# Altium PCB pcb.PcbDoc
Units mm, origin at the board's own origin, x right, y up, seen from the top; angles counter-clockwise.
Board outline 50 x 50 mm, 2 copper layers (Top Layer, Bottom Layer); 80 components, 69 nets, 283 pads, 191 vias.
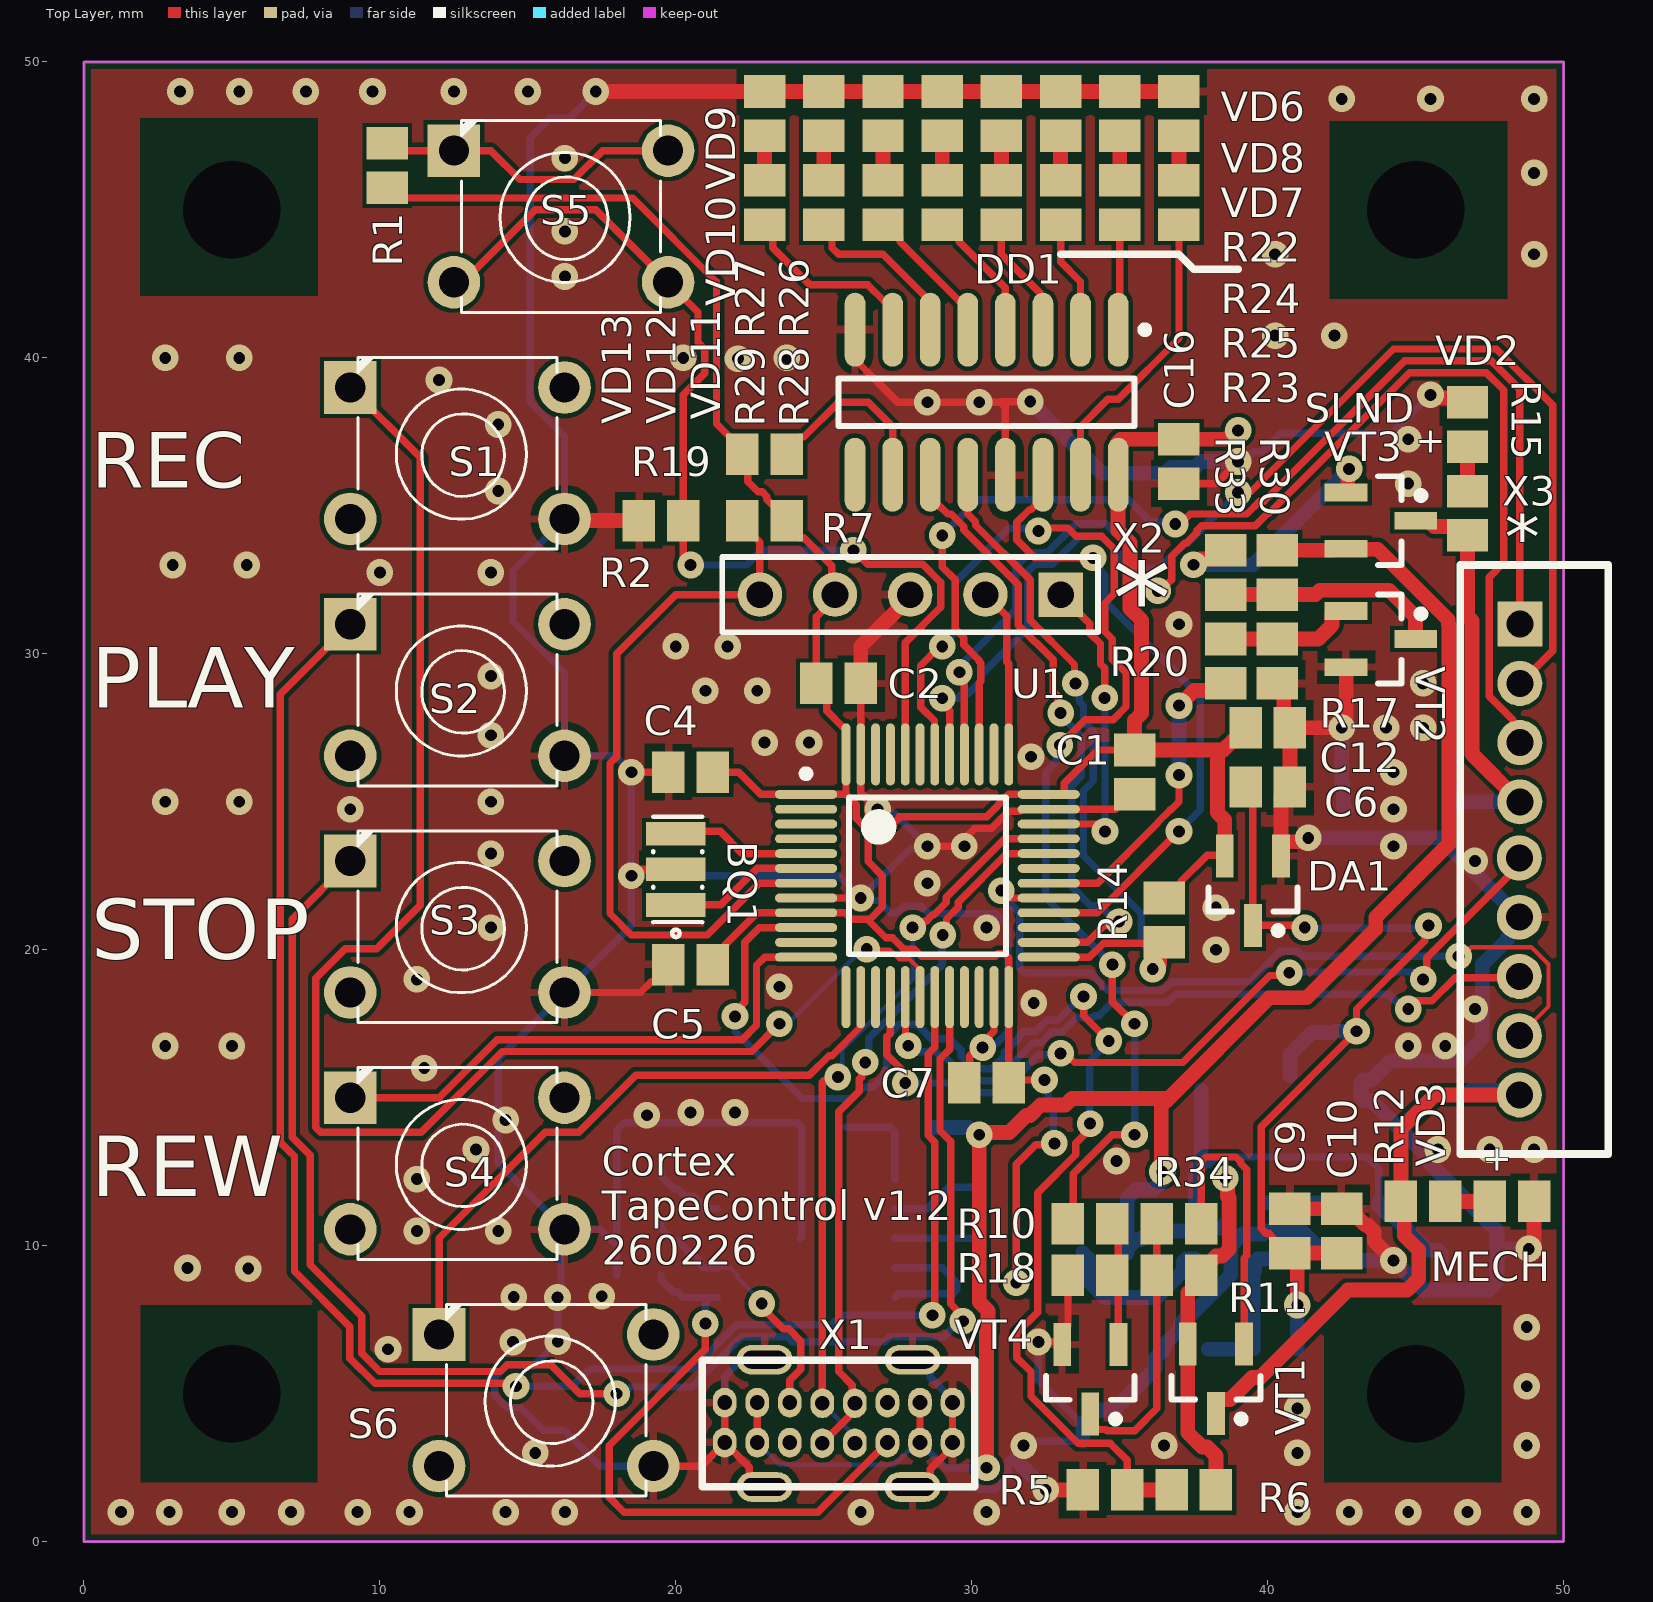
[diagram p0: Top Layer view]
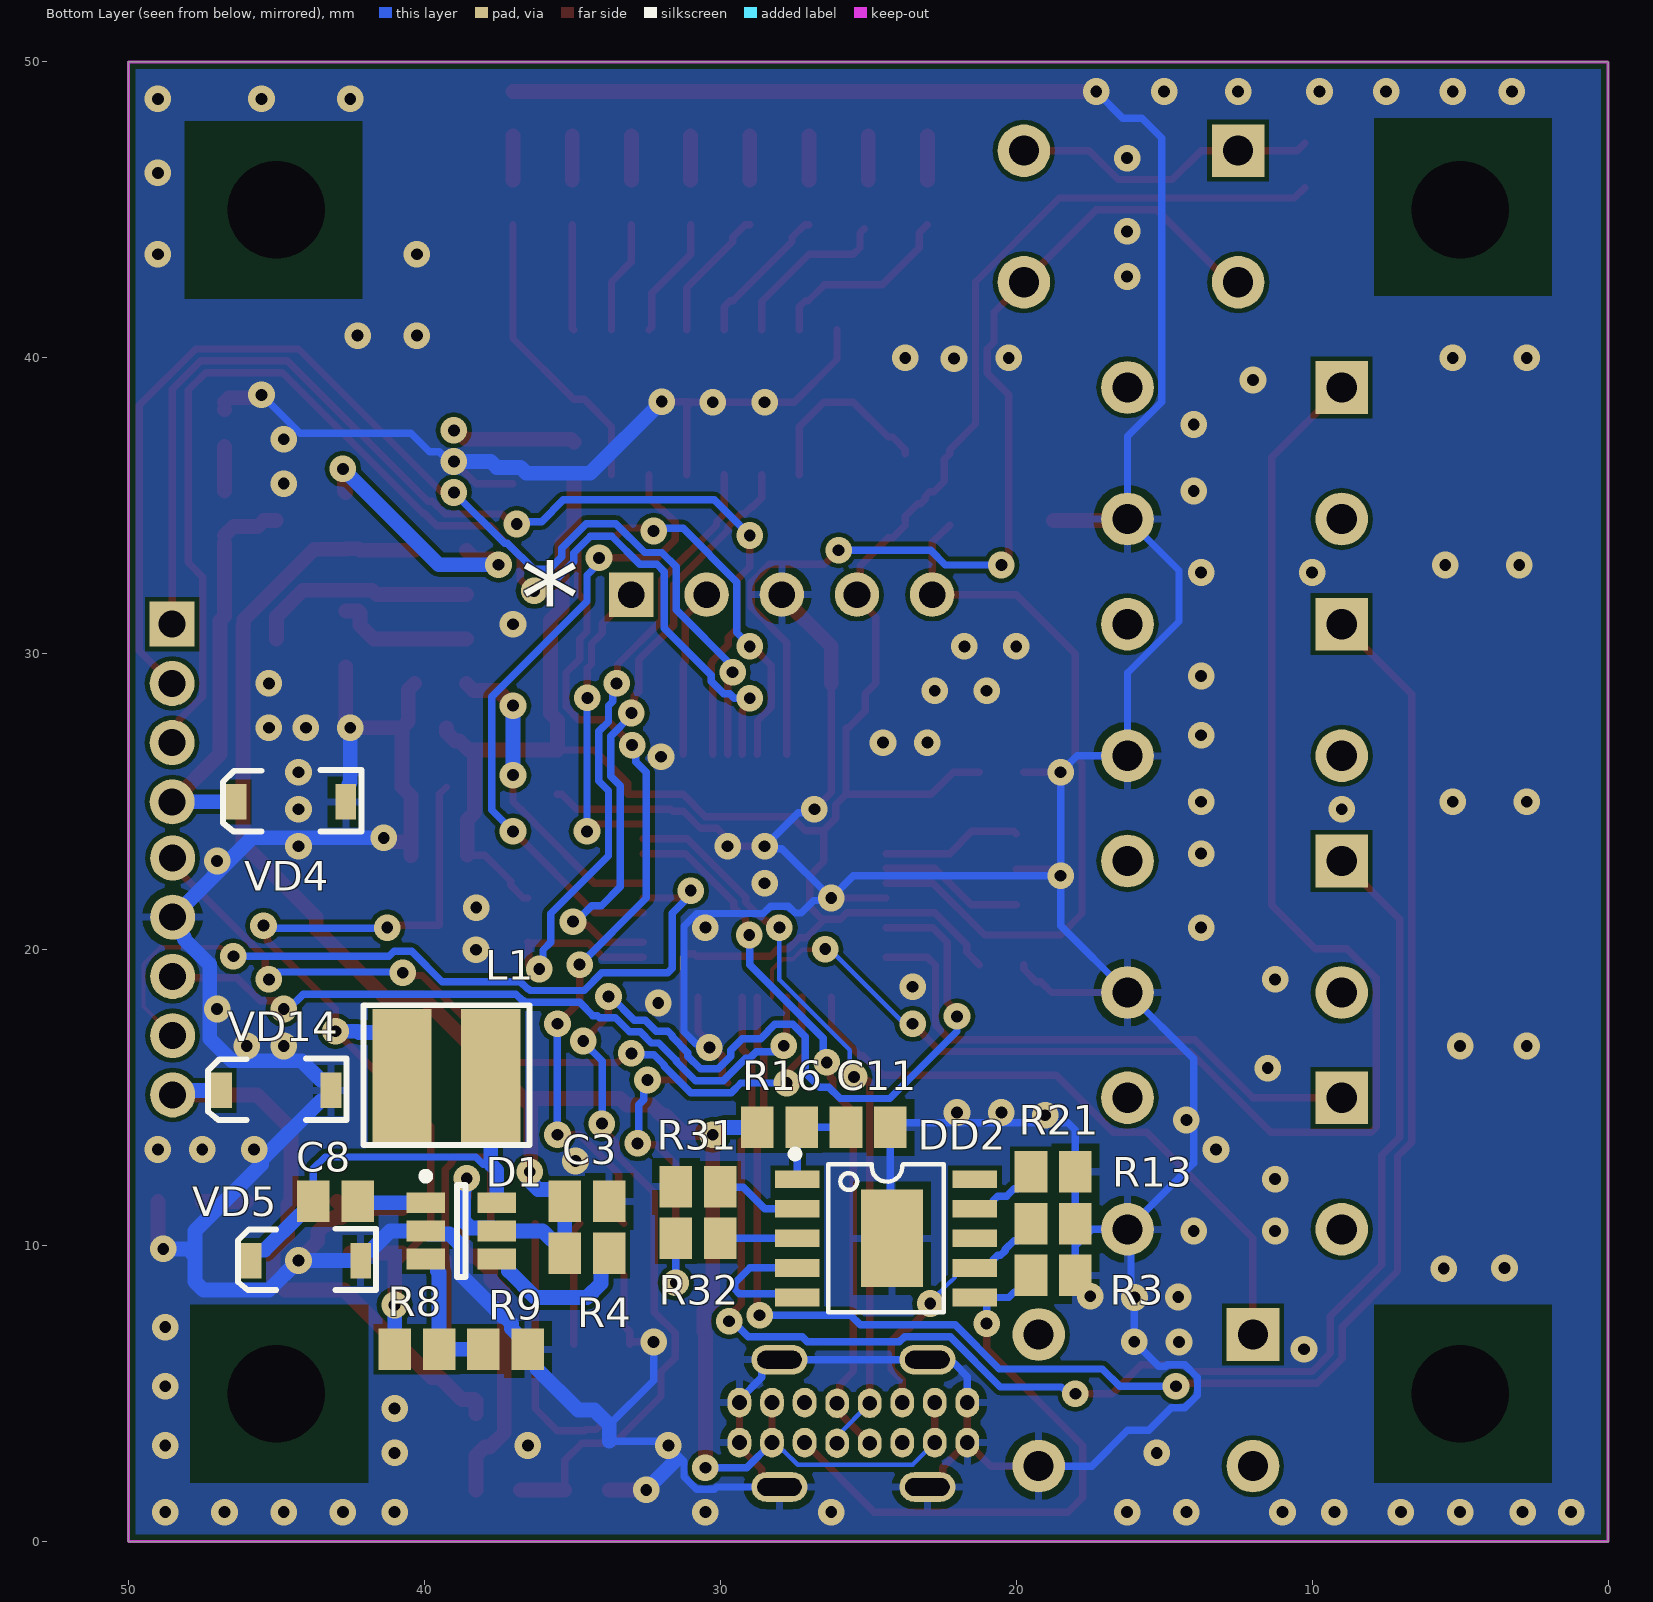
[diagram p1: Bottom Layer view, seen from below]
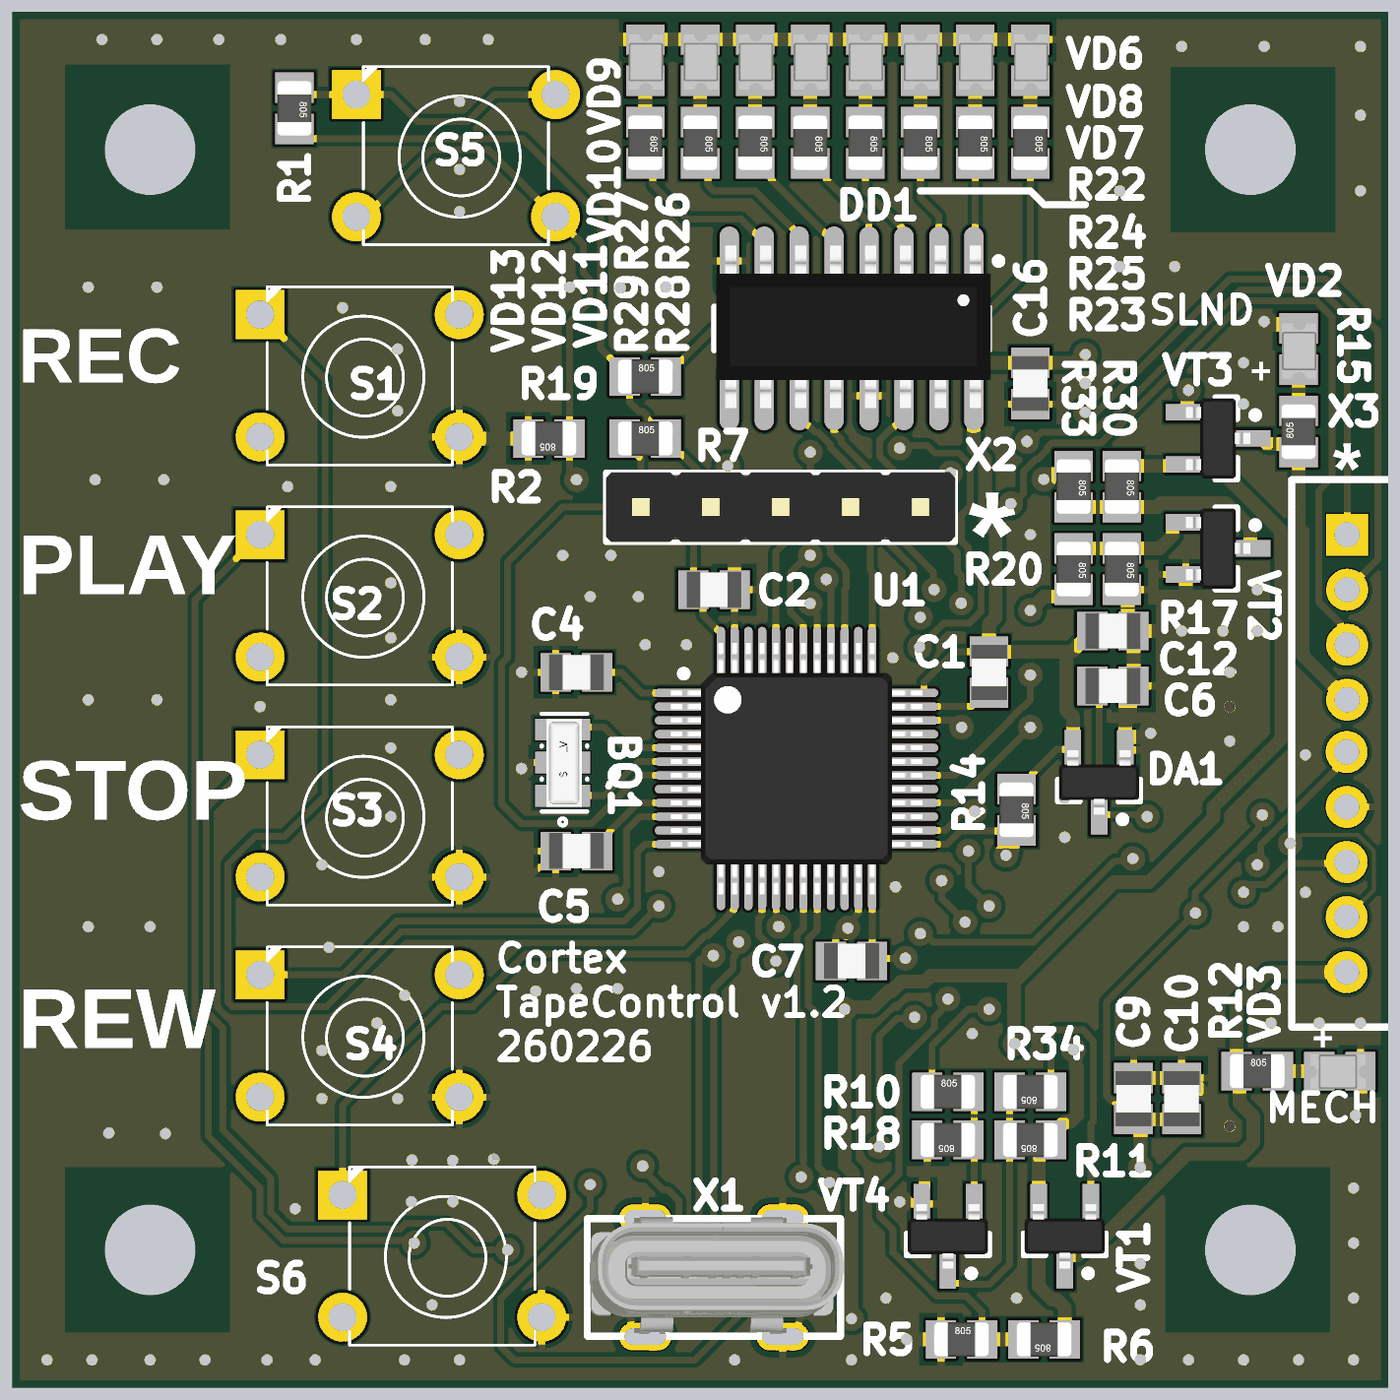
[diagram p2: 3D render of the assembled board from above, using the file's embedded part models]
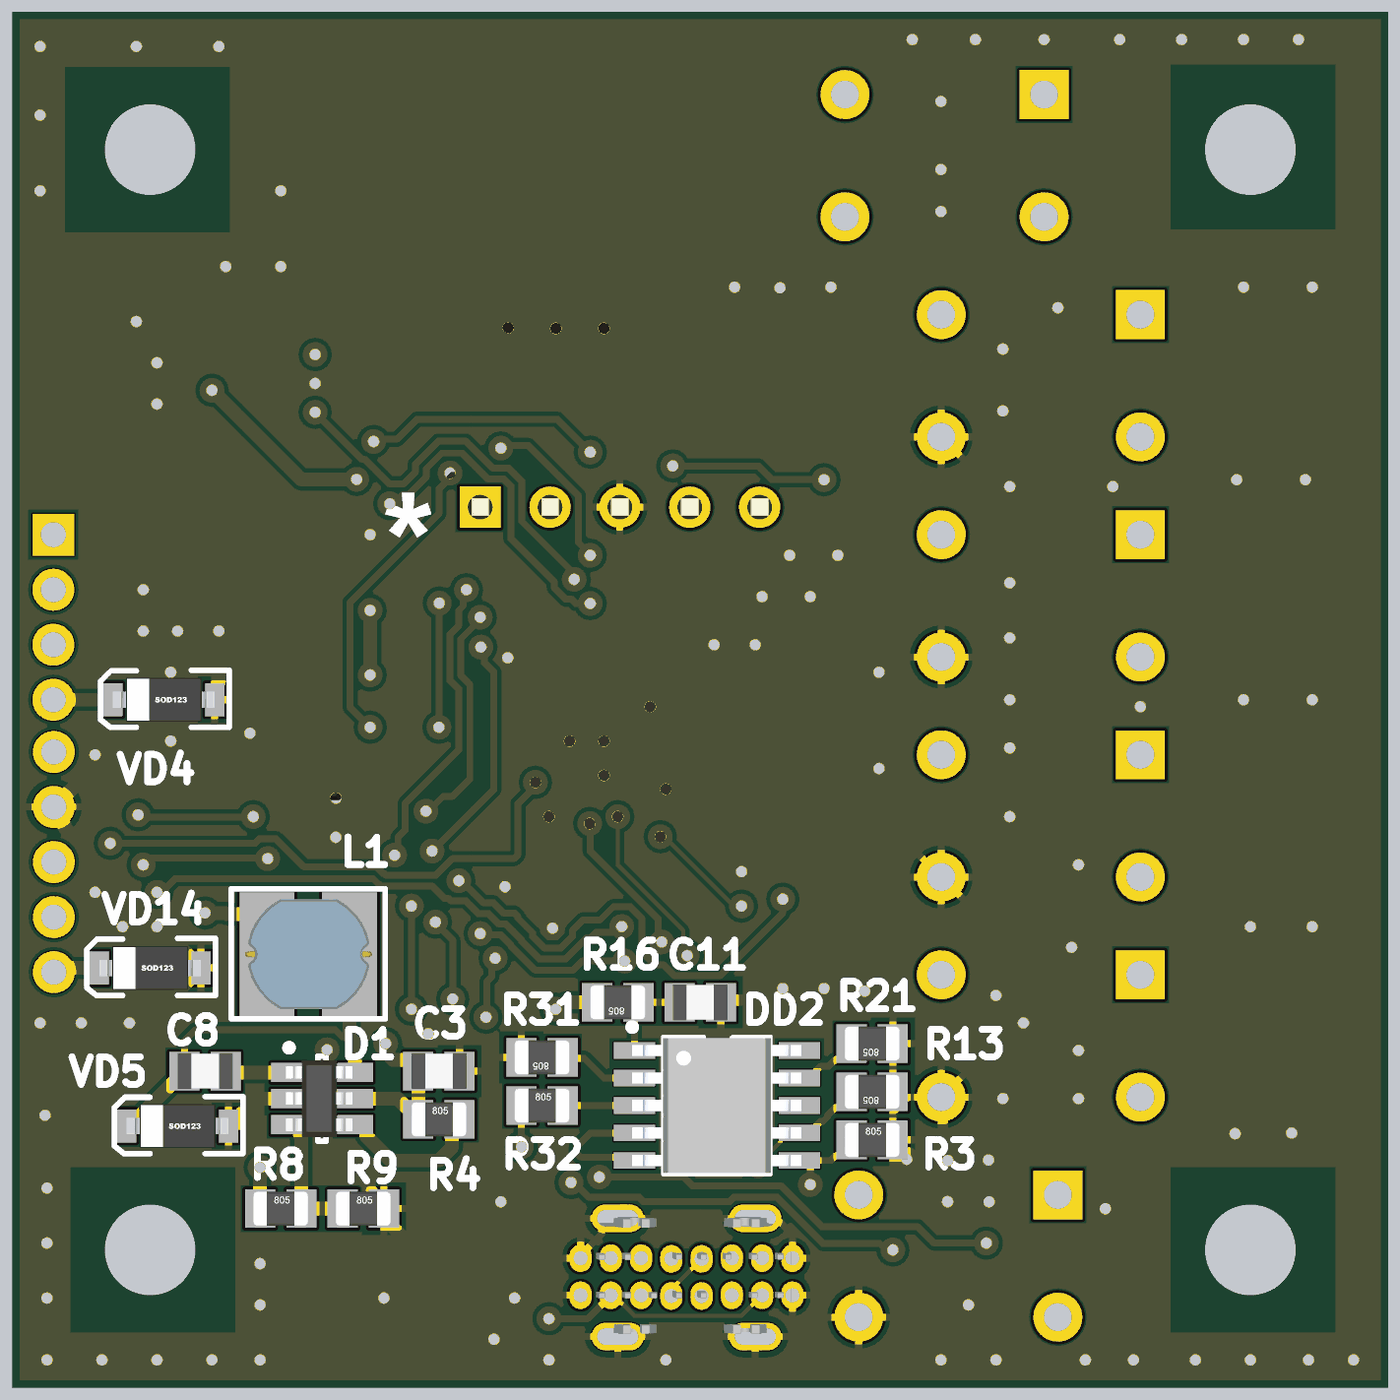
[diagram p3: 3D render of the assembled board from below, using the file's embedded part models]

## Layer stack, top to bottom
Top Solder: solder mask 0.0102, Solder Resist, Dk 3.5
Top Layer: signal copper 0.0356
Dielectric 1: dielectric 0.32, FR-4, Dk 4.8
Bottom Layer: signal copper 0.0356
Bottom Solder: solder mask 0.0102, Solder Resist, Dk 3.5

## Board outline
0,0 0,50 50,50 50,0

## Design rules (kind name [scope] priority, off if disabled: settings)
BoardOutlineClearance [All] p1: gap=0.25 ignorepadtopadclearanceinfootprint=FALSE
Clearance [All] p1: gap=0.15 ignorepadtopadclearanceinfootprint=FALSE except(0: Arc-Hole Track-Hole SMDPad-Hole THPad-Hole Via-Hole Fill-Hole Poly-Hole Region-Hole Text-Hole; 0.25: Poly-Region)
PolygonConnect PolygonConnectVia [InNet('GND') vs IsVia AND InNet('GND')] p1: connectstyle=Direct reliefconductorwidth=0.254 reliefentries=4 polygonreliefangle="90 Angle" airgapwidth=0
PolygonConnect [All] p2: connectstyle=Relief reliefconductorwidth=0.254 reliefentries=4 polygonreliefangle="90 Angle" airgapwidth=0.254
RoutingVias [All] p1: holewidth=0.4 width=0.9 viastyle="Through Hole" minholewidth=0.4 minwidth=0.9 maxholewidth=0.4 maxwidth=0.9
SolderMaskExpansion [All] p1: expansion=0.102 istentingtop=FALSE
Width [All] p1: maxlimit=0.5 minlimit=0.15 preferedwidth=0.25
30 further rules are at their usual default settings.

## Components (designator, comment, footprint, x,y, rotation, side; value= is the part's Value field where it differs from the comment)
BQ1 "CSTCE8M00G15C99" CRYSTAL-SMD_3P-L3.2-W1.3-P1.2-BL-1 20,22.5 r90 top
C1 "C_2" C0805 35.5,26 r270 top value="0.1 мкФ"
C2 "C_2" C0805 25.5,29 r0 top value="0.1 мкФ"
C3 "C_2" C0805 34.5,11.5 r180 bottom value="4.7 мкФ"
C4 "C_2" C0805 20.5,26 r180 top value="0.1 мкФ"
C5 "C_2" C0805 20.5,19.5 r180 top value="0.1 мкФ"
C6 "C_2" C0805 40,25.5 r0 top value="0.1 мкФ"
C7 "C_2" C0805 30.5,15.5 r180 top value="0.1 мкФ"
C8 "C_2" C0805 43,11.5 r0 bottom value="0.1 мкФ"
C9 "C_2" C0805 40.75,10.5 r90 top value="4.7 мкФ"
C10 "C_2" C0805 42.5,10.5 r90 top value="4.7 мкФ"
C11 "C_2" C0805 25,14 r180 bottom value="0.1 мкФ"
C12 "C_2" C0805 40,27.5 r0 top value="0.1 мкФ"
C16 "C_2" C0805 37,36.5 r270 top value="0.1 мкФ"
D1 "AOZ1282CI" SOT23-6_M 38.75,10.5 r180 bottom
DA1 "XC6206" SOT23_S 39.5,22 r270 top
DD1 "74HC595" SO-16_M 30.5,38.5 r270 top
DD2 "CH224K" ESSOP-10_L4.9-W3.9-P1.0-LS6.0-TL-EP 24.5,10.25 r270 bottom
L1 "L_1" 4.5X3.0 39.25,15.75 r0 bottom value=22мкГн
R1 "R_1" r0805 10.25,46.5 r270 top value=0
R2 "R_1" r0805 19.5,34.5 r180 top value=10кОм
R3 "R_1" r0805 18.75,9 r180 bottom value=10кОм
R4 "R_1" R0805 34.5,9.75 r180 bottom value=10кОм
R5 "R_1" r0805 34.5,1.75 r0 top value=1k
R6 "R_1" r0805 37.5,1.75 r180 top value=10кОм
R7 "R_1" r0805 23,34.5 r0 top value=10кОм
R8 "R_1" R0805 40.25,6.5 r180 bottom value=51кОм
R9 "R_1" R0805 37.25,6.5 r180 bottom value=10кОм
R10 "R_1" r0805 34,10.75 r0 top value=1кОм
R11 "R_1" r0805 37,9 r180 top value=10кОм
R12 "R_1" R0805 45.25,11.5 r0 top value=1.5кОм
R13 "R_1" r0805 18.75,10.75 r0 bottom value=10кОм
R14 "R_1" r0805 36.5,21 r270 top value=10кОм
R15 "R_1" R0805 46.75,34.75 r90 top value=1.5кОм
R16 "R_1" r0805 28,14 r0 bottom value=1k
R17 "R_1" r0805 40.325,29.75 r270 top value=10кОм
R18 "R_1" r0805 34,9 r180 top value=10кОм
R19 "R_1" r0805 23,36.75 r0 top value=10кОм
R20 "R_1" r0805 38.575,29.75 r270 top value=1кОм
R21 "R_1" r0805 18.75,12.5 r0 bottom value=0
R22 "R_1" R0805 37,45.25 r270 top value=330Ом
R23 "R_1" R0805 35,45.25 r270 top value=330Ом
R24 "R_1" R0805 33,45.25 r270 top value=330Ом
R25 "R_1" R0805 31,45.25 r270 top value=330Ом
R26 "R_1" R0805 29,45.25 r270 top value=330Ом
R27 "R_1" R0805 27,45.25 r270 top value=330Ом
R28 "R_1" R0805 25,45.25 r270 top value=330Ом
R29 "R_1" R0805 23,45.25 r270 top value=330Ом
R30 "R_1" r0805 40.325,32.75 r270 top value=10кОм
R31 "R_1" r0805 30.75,12 r0 bottom value=0
R32 "R_1" r0805 30.75,10.25 r180 bottom value=0
R33 "R_1" r0805 38.575,32.75 r270 top value="100 Ом"
R34 "R_1" r0805 37,10.75 r180 top value="100 Ом"
S1 "SW_BOT" SW-PB 9,39 r0 top
S2 "SW_BOT" SW-PB 9,31 r0 top
S3 "SW_BOT" SW-PB 9,23 r0 top
S4 "SW_BOT" SW-PB 9,15 r0 top
S5 "SW_BOT" SW-PB 12.5,47 r0 top
S6 "SW_BOT" SW-PB 12,7 r0 top
U1 "STM32F072CBT6" TQFP48_M 28.5,22.5 r0 top
VD2 "LED" L0805 46.75,37.75 r90 top
VD3 "LED" L0805 48.25,11.5 r0 top
VD4 "MBR0540T1G" SOD123 44.5,25 r0 bottom
VD5 "MBR0540T1G" SOD123 44,9.5 r0 bottom
VD6 "LED" L0805 37,48.25 r90 top
VD7 "LED" L0805 35,48.25 r90 top
VD8 "LED" L0805 33,48.25 r90 top
VD9 "LED" L0805 31,48.25 r90 top
VD10 "LED" L0805 29,48.25 r90 top
VD11 "LED" L0805 27,48.25 r90 top
VD12 "LED" L0805 25,48.25 r90 top
VD13 "LED" L0805 23,48.25 r90 top
VD14 "MBR0540T1G" SOD123 45,15.25 r0 bottom
VT1 "IRLML5203" SOT23_M 38.25,5.5 r270 top
VT2 "BC847" SOT23_S 43.825,30.5 r0 top
VT3 "IRLML5203" SOT23_M 43.825,34.5 r0 top
VT4 "BC847" SOT23_S 34.005,5.495 r270 top
X1 "USBC-16PIN-VERTICAL" USB-C-16-pin-vertical 25.5,4 r0 top
X2 "PLS5" HDR1X5 33,32 r180 top
X3 "PLS9" PH-9A_P 48.5,31 r90 top

## Footprints (in the part's own frame and the unit in brackets; to place one, negate y for a bottom-side part, rotate by r counter-clockwise, add the part's x,y. Pads: shape width x height; smd on the part's side, far side on the other; paste and mask are expansions set on the pad)
4.5X3.0 [mm] "SM LED; 2 C-Bend Leads; Body 4.5 x 3 mm, inc leads (LxW typ)"
  rect 2x4.5 smd: 1(-1.5,0) 2(1.5,0)
  silkscreen extent -2.8,-2.37 2.8,2.35, body extent -2.33,-2 2.3,2, height 3.3
C0805 [mm] "Chip Capacitor, Body 2.0x1.3mm, IPC High Density"
  rect 1.1x1.4 smd: 1(-0.75,0) 2(0.75,0)
  body extent -1,-0.65 1,0.66, height 0.73
CRYSTAL-SMD_3P-L3.2-W1.3-P1.2-BL-1 [mm]
  rect 0.8x2 smd paste+0 mask+0.051: 1(-0.984,0) 2(0.216,0) 3(1.416,0)
  silkscreen extent -2.07,-0.89 2,0.76, body extent -1.4,-0.7 1.8,0.6, height 1.02
ESSOP-10_L4.9-W3.9-P1.0-LS6.0-TL-EP [mm]
  rect 0.6x1.5 smd paste+0 mask+0.05: 1(-2,-2.895) 2(-1,-2.895) 3(0,-2.895) 4(1,-2.895) 5(2,-2.895) 6(2,3.105) 7(1,3.105) 8(0,3.105) 9(-1,3.105) 10(-2,3.105)
  rect 3.3x2.1 smd paste+0 mask+0.05: 11(0,0.305)
  silkscreen extent -2.97,-3.1 2.5,2.06, body extent -2.45,-2.98 2.45,3.18, height 1.4
HDR1X5 [mm] "Connector; Header; 5 Position"
  rect 1.5x1.5 hole 0.9: 1(0,0)
  round 1.5 hole 0.9: 2(2.54,0) 3(5.08,0) 4(7.62,0) 5(10.16,0)
  silkscreen extent -1.27,-1.27 11.43,1.27, body extent -1.27,-1.27 11.43,1.27, height 8.54
L0805 [mm] "Chip LED Body 2.0x1.3mm, IPC High Density"
  rect 1.1x1.4 smd: 1(-0.75,0) 2(0.75,0)
  body extent -1.07,-0.65 0.93,0.6, height 0.83
PH-9A_P [mil]
  rect 60x60 hole 36 paste+0 mask+2: 1(0.04,-0.68)
  round 60 hole 36 paste+0 mask+2: 2(-78.76,-0.68) 3(-157.46,-0.68) 4(-236.26,-0.68) 5(-311,0) 6(-389.7,0) 7(-468.5,0) 8(-547.3,0) 9(-626.1,0)
  silkscreen extent -705,-118 79,79
r0805 [mm] "Chip Resistor"
  rect 1.1x1.4 smd: 1(-0.75,0) 2(0.75,0)
  body extent -1,-0.62 1,0.62, height 0.78
R0805 [mm] "Chip Resistor"
  rect 1.1x1.4 smd: 1(-0.75,0) 2(0.75,0)
  body extent -1,-0.63 1,0.62, height 0.78
SO-16_M [mm] "SOIC, 16-Leads, Body 9.9x3.9mm, Pitch 1.27mm, IPC Low Density"
  oval 2.5x0.7 smd: 1(-2.45,4.445) 2(-2.45,3.175) 3(-2.45,1.905) 4(-2.45,0.635) 5(-2.45,-0.635) 6(-2.45,-1.905) 7(-2.45,-3.175) 8(-2.45,-4.445) 9(2.45,-4.445) 10(2.45,-3.175) 11(2.45,-1.905) 12(2.45,-0.635) 13(2.45,0.635) 14(2.45,1.905) 15(2.45,3.175) 16(2.45,4.445)
  silkscreen extent -2.57,-5 0.8,5.47, body extent -3.01,-4.92 2.9,5.06, height 1.45
SOD123 [mm] "SMT LED; 2 Flat Leads"
  rect 0.7x1.2 smd: 1(-1.85,0) 2(1.85,0)
  silkscreen extent -2.37,-1.07 2.3,1, body extent -1.85,-0.8 1.85,0.8, height 1.27
SOT23-6_M [mm] "SOT23, 6-Leads, Body 2.9x1.6mm, Pitch 0.95mm, Lead Span 2.7mm, IPC Low Density"
  rect 1.3x0.7 smd: 1(-1.2,0.95) 2(-1.2,0) 3(-1.2,-0.95) 4(1.2,-0.95) 5(1.2,0) 6(1.2,0.95)
  silkscreen extent -1.33,-1.55 0.15,1.97, body extent -1.31,-1.39 1.11,1.4, height 1.09
SOT23_M [mm] "SOT23, 3-Leads, Body 2.9x1.3mm, Pitch 0.95mm, Lead Span 2.3mm, IPC Low Density"
  rect 1.45x0.6 smd: 1(-1.175,0.95) 2(-1.175,-0.95) 3(1.175,0)
  silkscreen extent -0.1,-1.5 1.47,1.5, body extent -1.17,-1.46 1.17,1.46, height 1
SOT23_S [mm] "SOT23, 3-Leads, Body 2.9x1.3mm, Pitch 0.95mm, Lead Span 2.3mm, IPC Low Density"
  rect 1.45x0.6 smd: 1(-1.175,0.95) 2(-1.175,-0.95) 3(1.175,0)
  silkscreen extent -0.1,-1.5 1.47,1.5, body extent -1.17,-1.46 1.17,1.46, height 1
SW-PB [mil]
  rect 70x70 hole 40: 1(0,0)
  round 70 hole 40: 2(285,-175) 3(0,-175) 4(285,0)
  silkscreen extent 10,-215 275,40, body extent -6,-216 291,40, height 287
TQFP48_M [mm] "48-Pin Thin Quad Flat Pack 0.5 mm Pitch, IPC Low Density"
  oval 2.1x0.3 smd: 1(-4.1,2.75) 2(-4.1,2.25) 3(-4.1,1.75) 4(-4.1,1.25) 5(-4.1,0.75) 6(-4.1,0.25) 7(-4.1,-0.25) 8(-4.1,-0.75) 9(-4.1,-1.25) 10(-4.1,-1.75) 11(-4.1,-2.25) 12(-4.1,-2.75) 25(4.1,-2.75) 26(4.1,-2.25) 27(4.1,-1.75) 28(4.1,-1.25) 29(4.1,-0.75) 30(4.1,-0.25) 31(4.1,0.25) 32(4.1,0.75) 33(4.1,1.25) 34(4.1,1.75) 35(4.1,2.25) 36(4.1,2.75)
  oval 0.3x2.1 smd: 13(-2.75,-4.1) 14(-2.25,-4.1) 15(-1.75,-4.1) 16(-1.25,-4.1) 17(-0.75,-4.1) 18(-0.25,-4.1) 19(0.25,-4.1) 20(0.75,-4.1) 21(1.25,-4.1) 22(1.75,-4.1) 23(2.25,-4.1) 24(2.75,-4.1) 37(2.75,4.1) 38(2.25,4.1) 39(1.75,4.1) 40(1.25,4.1) 41(0.75,4.1) 42(0.25,4.1) 43(-0.25,4.1) 44(-0.75,4.1) 45(-1.25,4.1) 46(-1.75,4.1) 47(-2.25,4.1) 48(-2.75,4.1)
  silkscreen extent -4.22,-2.65 2.65,3.57, body extent -4.57,-4.57 4.57,4.57, height 1.62
USB-C-16-pin-vertical [mm]
  oval 1.9x1 hole 0.6 slot 1.5 at 0 deg paste+0 mask+0.05: 1(-2.5,-2.15) 1(-2.5,2.15) 1(2.5,-2.15) 1(2.5,2.15)
  oval 0.8x1 hole 0.5: A1(-3.85,0.7) A4(-2.75,0.7) A5(-1.65,0.7) A6(-0.55,0.675) A7(0.55,0.675) A8(1.65,0.7) A9(2.75,0.7) A12(3.85,0.7) B1(3.85,-0.65) B4(2.75,-0.65) B5(1.65,-0.65) B6(0.55,-0.675) B7(-0.55,-0.675) B8(-1.65,-0.65) B9(-2.75,-0.65) B12(-3.85,-0.65)
  silkscreen extent -4.6,-2.14 4.6,2.14, body extent -4.58,-2.23 4.76,2.37, height 10

## Part data
BQ1: Manufacturer="ф. Murata", ManufacturerPartNumber=CSTCE8M00G15C99, Pack=SMB(DO-214AA), Type="Кварцевый резонатор"
C1 C2 C4 C5 C6 C7 C8 C11 C12 C16: Power/Voltage=50В, Tolerance=5%, Name="X7R, 0805", Type=Конденсатор
C3 C9 C10: Power/Voltage=25В, Tolerance=5%, Name="X7R, 0805", Type=Конденсатор
D1: Manufacturer="ф. Alpha & Omega", ManufacturerPartNumber=AOZ1282CI, Name=https://www.chipdip.ru/product0/8001834236, Type=Микросхема
DA1: Manufacturer="ф. Torex", ManufacturerPartNumber=XC6206
DD1: Manufacturer="ф. Nexperia B.V.", ManufacturerPartNumber=74HC595D, Type=Микросхема
DD2: Manufacturer="ф. WCH", ManufacturerPartNumber=CH224K, Type=Микросхема
L1: Manufacturer="ф. CODACA", Tolerance=10%, Name=SP43-220K, Type="Катушка индуктивности"
R1 R2 R3 R4 R5 R6 R7 R8 R9 R10 R11 R12 R13 R14 R15 R16 R17 R18 R19 R20 R21 R22 R23 R24 R25 R26 R27 R28 R29 R30 R31 R32 R33 R34: Tolerance=5%, Name=0805, Type=Резистор
S1 S2 S3 S4 S5 S6: ManufacturerPartNumber="Кнопка тактовая 4.5x6.5мм", Type="Тактовая кнопка"
U1: library part STM32L052CL3, "No Description Available", Manufacturer_Part_Number=stm32l052cl3, Copyright="Copyright (C) 2016 Accelerated Designs. All rights reserved", ManufacturerPartNumber=STM32F072CBT6, RefDes=RefDes, Type=DEV, Vendor=STMicroelectronics
VD2 VD3: ManufacturerPartNumber="KPT-2012SGC (Красный)  *любой 0805", Pack="SMD 0805", Type=Светодиод
VD4 VD5 VD14: Manufacturer="ф.  ON Semi", ManufacturerPartNumber=MBR0540T1G, Pack=SOT23, Type=Диод
VD6 VD7 VD8 VD9 VD10 VD11 VD12 VD13: ManufacturerPartNumber="KPT-2012SGC (Зеленый)  *любой 0805", Pack="SMD 0805", Type=Светодиод
VT1 VT3: Manufacturer="ф. IR", ManufacturerPartNumber=IRLML5203, Type=Транзистор
VT2 VT4: Manufacturer="ф. NXP", ManufacturerPartNumber=BC847, Type=Транзистор
X1: Manufacturer="ф. Ningbo Zhenqin Electronic", ManufacturerPartNumber=PLS11, Type=Разъём
X2: Manufacturer="ф. Ningbo Zhenqin Electronic", ManufacturerPartNumber=PLS5, Type=Разъём
X3: Manufacturer="ф. Ningbo Zhenqin Electronic", ManufacturerPartNumber=PH2.0-9A_P, Type=Разъём

## Free pads (board coordinates)
  round 1.524 hole 3.3 unplated: 2(5,5) 2(5,45) 2(45,5) 2(45,45)

## Via types
v1: diameter 0.9, hole 0.4, Top Layer to Bottom Layer, tented both sides, 191 vias

## Nets (pads, with @x,y where several pads share a name; then routed paths per layer and width w, separated by ;. In a path a pad name is that pad's centre, name@x,y a point inside that pad or via, vN(x,y) a via of type N, cw(c..) or ccw(c..) an arc to the next point about the centre after c; other vN are vias at no path point)
+3.3V: C1.1 C2.1 C4.1 C5.1 C7.1 C12.1 C16.1 DA1.2 DD1.16 R1.2 R7.2 R14.1 R19.1 R32.1 U1.1 U1.9 U1.24 U1.36 U1.48 X2.4 | length 103.3
  Top Layer w0.25: R1.2 10.6,45.4 18.54,45.4 21.375,42.565 21.375,37.775 22.25,36.9 R19.1 22.429,36.571 22.429,35.821 22.775,35.475 22.914,35.475 23.075,35.314 23.075,35.221 23.221,35.075 23.325,35.075 23.75,34.65 R7.2 ; C5.1 21.675,19.925 21.675,20.175 22.75,21.25 U1.9 25.725,21.25 25.95,21.025 26.55,21.025 26.975,21.45 26.975,22.508 26.5,22.983 26.5,24.04 ; C4.1 22.125,26 22.875,25.25 U1.1 25.75,25.25 ; R7.2@23.75,34.35 24.175,33.925 24.325,33.925 25.271,32.979 25.271,32.109 X2.4 ; X2.4@25.38,31.876 24.75,31.246 C2.1 25.1,28.65 25.1,28.071 25.662,27.51 25.727,27.51 25.75,27.486 U1.48 25.75,25.25 ; 26.475,21.025 27.1,20.4 27.325,20.4 27.7,20.025 28.05,20.025 28.3,19.775 30.8,19.775 30.896,19.871 31.104,19.871 31.25,19.725 U1.24 C7.1 31.351,15.601 v1(32.457,15.601) ; v1(31.5,8.75) 31.5,12.75 32.167,13.417 32.75,13.417 v1(32.792,13.458) ; C1.1 34.25,26.75 33.129,25.629 33.129,25.273 33.105,25.25 U1.36 31.25,25.25 30.5,24.5 27.543,24.5 27.543,24.448 27.118,24.023 26.517,24.023 26.093,24.448 26.093,24.907 25.75,25.25 ; R14.1 36.65,21.75 37.075,22.175 37.075,22.325 37.95,23.2 DA1.2@38.55,23.2
  Top Layer w0.5: DD1.16 34.945,34.159 35.345,33.759 35.345,31.522 35.737,31.13 35.737,27.995 35.5,27.758 C1.1 38.3,26.75 ; DD1.16@34.945,37.158 35.037,37.25 38.592,37.25 38.892,37.55 v1(39,37.55) ; DA1.2@38.55,23.2 38.55,24.384 38.3,24.634 38.3,26.75 ; C12.1 39.25,27.35 38.95,27.05 38.8,27.05 38.5,26.75 38.3,26.75
  Bottom Layer w0.25: v1(31.5,8.75) R32.1 ; v1(32.457,15.601) 32.581,15.477 32.581,14.93 32.75,14.761 32.75,13.5 v1(32.792,13.458) ; v1(39,37.55) v1@39.075,37.625
+5V: C6.1 C9.1 C10.1 DA1.3 L1.2 R8.1 | length 33.1
  Top Layer w0.25: C6.1 39.5,25.25 DA1.3 v1@41.25,20.825 ; C9.1 40.6,9.75 40.175,10.175 40.175,10.279 40.029,10.425 39.936,10.425 39.775,10.586 39.775,14.025 v1(43,17.25) 43,18 45.309,20.309 45.309,20.692 v1(45.433,20.817)
  Top Layer w0.5: v1(41,8) 41,9.5 C9.1 C10.1
  Bottom Layer w0.25: v1(41.25,20.75) 41.267,20.733 45.349,20.733 v1(45.433,20.817)
  Bottom Layer w0.5: L1.2 40.75,16.457 41.5,17.207 42.207,17.207 42.25,17.25 v1(43,17.25) ; R8.1 v1(41,8)
BOOT0: R2.1 S5.2 S5.3 U1.44 | length 35.2
  Top Layer w0.25: S5.3 12.805,42.555 15.25,45 17.294,45 S5.2 20.75,41.544 20.75,40.525 20.975,40.3 20.975,39.475 20.25,38.75 R2.1 20.25,33.25 v1(20.5,33) ; v1(26,33.5) 26.475,33.025 28.345,33.025 28.945,32.425 28.945,31.575 27.75,30.38 U1.44
  Bottom Layer w0.25: v1(20.5,33) 22.39,33 22.89,33.5 v1(26,33.5)
BRAKE_SENS: U1.16 X3.5 | length 27.8
  Top Layer w0.25: U1.16 27.24,18.39 27.24,17.166 27.129,17.055 27.129,16.455 27.626,15.958 ; v1(33,16.5) 33.164,16.5 33.471,16.193 37.125,16.193 40.063,19.131 40.631,19.131 v1(40.726,19.226) ; v1(45.25,19) 45.374,19.124 45.374,19.733 48.5,22.858 X3.5
  Bottom Layer w0.25: v1(27.75,15.5) 29.299,15.5 29.625,15.174 30.999,15.174 31.892,16.068 31.892,16.105 32.237,16.45 v1@32.973,16.45 ; v1(40.726,19.226) 40.75,19.25 44.918,19.25 45.209,18.959 v1(45.25,19)
btn0: S1.1 U1.18 | length 52.4
  Top Layer w0.15: v1(26.453,20.022) 26.646,20.022 26.67,20.046 26.67,20.005 26.675,20 27.23,20 27.555,19.675 27.905,19.675 28.25,19.33 U1.18
  Top Layer w0.25: S1.1 11.364,36.636 11.364,21.5 9.898,20.034 8.833,20.034 7.836,19.037 7.836,13.997 7.997,13.836 11.402,13.836 14.13,16.564 22.564,16.564 v1(23.5,17.5)
  Bottom Layer w0.15: v1(23.5,17.5) 23.781,17.5 26.303,20.022 v1(26.453,20.022)
btn1: S2.1 U1.19 | length 58.8
  Top Layer w0.25: S2.1 6.636,28.636 6.636,13.5 6.943,13.193 7.114,13.022 7.114,9.136 8.987,7.263 8.987,6.197 9.834,5.35 v1@14.6,5.35 ; v1(28.668,7.65) 28.75,7.732 28.75,13.5 28.525,13.725 28.525,16.48 28.75,16.705 U1.19
  Bottom Layer w0.25: v1(14.6,5.25) 16.5,5.25 17.086,5.836 20.574,5.836 22.063,7.325 25.275,7.325 25.6,7.65 v1(28.668,7.65)
btn2: S3.1 U1.20 | length 52.2
  Top Layer w0.25: S3.1 7.036,21.036 7.036,13.666 7.65,13.052 7.65,9.35 9.387,7.613 9.387,6.363 10,5.75 14.075,5.75 14.3,5.975 15.775,5.975 16.75,5 v1(18,5) ; U1.20 29.25,16.639 28.925,16.314 28.925,13.891 29.283,13.533 29.283,8.041 29.699,7.625 v1(29.699,7.449)
  Bottom Layer w0.25: v1(18,5) 18.121,4.879 18.47,5.228 20.532,5.228 22.229,6.925 23.771,6.925 23.946,6.75 27.054,6.75 27.229,6.925 29.056,6.925 29.58,7.449 v1(29.699,7.449)
btn3: S4.1 U1.12 | length 18.6
  Top Layer w0.25: S4.1 12,15 13.964,16.964 22.239,16.964 22.725,17.45 22.725,19.475 23,19.75 U1.12
btn4: U1.13
btn5: S6.1 U1.14 | length 21.5
  Top Layer w0.25: S6.1 12,10.25 15.586,13.836 16.721,13.836 18.649,15.764 24.513,15.764 25.174,16.425 25.276,16.425 26.24,17.389 26.24,18.39 U1.14
CC1: DD2.7 R13.2 X1.A5 | length 8.9
  Top Layer w0.25: v1(22.905,8.05) 22.905,7.918 23.632,7.191 23.809,7.191 24.225,6.775 24.225,5.829 23.85,5.454 X1.A5
  Bottom Layer w0.15: DD2.7 21.845,9.25 22.07,9.025 22.07,8.93 22.225,8.775 22.238,8.775 22.905,8.108 v1(22.905,8.05)
  Bottom Layer w0.25: R13.2 19.5,10.6 19.925,10.175 20.075,10.175 20.37,9.88 20.37,9.836 20.531,9.675 20.623,9.675 20.77,9.529 20.77,9.425 20.945,9.25 DD2.7
CC2: DD2.6 R3.1 X1.B5 | length 21.3
  Top Layer w0.25: v1(21,7.375) 21,6.5 17.75,3.25 17.75,1.5 18.25,1 24.8,1 X1.B5
  Bottom Layer w0.25: R3.1 19.5,8.85 19.925,8.425 20.075,8.425 20.25,8.25 DD2.6 21.175,8.25 21,8.075 v1(21,7.375)
EXT_VOLTAGE: R5.2 R6.2 U1.10 | length 43.7
  Top Layer w0.25: v1(22,17.75) 22,17.896 22.325,18.221 22.325,20.259 22.816,20.75 U1.10 ; v1(33.776,18.423) 33.782,18.417 33.782,17.762 v1(34.626,16.918) ; v1(34,14.125) 34,13.949 33.517,13.466 33.517,13.082 32.225,11.791 32.225,7.75 31.525,7.05 31.525,6.218 32,5.743 32,4.911 33.591,3.32 34.68,3.32 35.25,2.75 R5.2
  Top Layer w0.5: R5.2 R6.2
  Bottom Layer w0.25: v1(22,17.75) 22,17.25 24.275,14.975 25.95,14.975 26.33,15.355 26.645,15.355 27.025,15.736 27.025,15.8 27.125,15.9 27.125,16.625 27.129,16.629 27.129,17.055 27.554,17.48 28.155,17.48 28.634,17 29.25,17 29.642,16.608 29.642,16.399 30.067,15.974 30.667,15.974 31.092,16.399 31.092,16.526 31.625,17.059 31.625,17.104 31.771,17.25 32.159,17.25 32.534,17.625 32.9,17.625 33.698,18.423 v1(33.776,18.423) ; 33.987,16.238 33.987,14.138 v1(34,14.125) ; 33.993,16.245 34.626,16.878 v1(34.626,16.918)
GND: BQ1.2 C1.2 C2.2 C3.2 C4.2 C5.2 C6.2 C7.2 C9.2 C10.2 C11.2 C12.2 C16.2 D1.2 DA1.1 DD1.8 DD1.13 DD2.11 R2.2 R3.2 R5.1 R9.2 R13.1 R17.2 R18.2 R21.1 R31.2 S1.2 S2.2 S3.2 S4.2 S6.2 U1.8 U1.23 U1.35 U1.47 VD2.2 VD3.2 VD4.1 VD5.1 VD6.2 VD7.2 VD8.2 VD9.2 VD10.2 VD11.2 VD12.2 VD13.2 VD14.1 VT2.2 VT4.2 X1.1 X1.A1 X1.A12 X1.B1 X1.B12 X2.3 X3.6 | length 282.4
  Top Layer w0.25: S3.2 18.805,18.555 19.175,18.925 19.325,18.925 19.75,19.35 C5.2 ; v1(18.5,22.5) 18.716,22.716 BQ1.2 ; v1(18.5,26) C4.2 ; S6.2 20.855,2.555 X1.B12 ; X1.A1 X1.B12 ; X1.1@22.828,1.85 22.481,2.196 22.481,2.519 X1.B12 ; U1.8 v1(26.25,21.75) ; DD1.8 26.055,39.945 27.5,38.5 30.989,38.5 ; C2.2 U1.47 26.25,25.316 v1(26.818,24.748) ; X1.1@28,1.85 28.247,1.85 28.594,2.196 28.594,2.444 29.35,3.2 X1.B1 X1.A12 ; v1(28.5,23.5) 29.505,23.5 30.105,24.1 30.666,24.1 31.241,24.675 31.611,24.675 31.686,24.75 U1.35 34.85,24.75 35.35,25.25 C1.2 ; C7.2 29.929,15.679 29.929,16.429 30.75,17.25 U1.23 ; DD1.13 31.135,38.354 30.989,38.5 ; v1(31.978,38.522) 31.011,38.522 30.989,38.5 ; v1(32.25,6.75) 32.975,6.75 VT4.2 33.055,7.095 33.25,7.29 R18.2 ; C16.2 38.25,35.75 v1(39,36.5)
  Top Layer w0.5: S1.2@16.294,34.5 R2.2 ; v1(17.293,49) VD13.2 VD12.2 VD11.2 VD10.2 VD9.2 VD8.2 VD6.2 ; C2.2 26.25,30.25 27.92,31.92 X2.3 ; v1(32.5,1.75) R5.1 ; R17.2 40.538,28.788 40.538,27.712 C12.2 ; DA1.1 DA1.1@40.45,23.6 ; C9.2 C10.2 ; v1(41.369,23.783) 41.261,23.783 41.128,23.65 40.5,23.65 DA1.1@40.45,23.6 ; VT2.2 42.65,27.758 42.5,27.608 v1(42.5,27.5) C12.2 ; C10.2@42.95,11.5 42.8,11.35 42.8,10.95 43.05,10.95 43.3,10.7 43.366,10.7 43.6,10.466 43.6,10.15 v1(44.25,9.5) ; v1(45.5,38.75) 45.595,38.655 46.595,38.655 VD2.2 ; v1(48.82,9.893) 49,10.072 VD3.2 ; DA1.1@40.45,23.6 40.45,25.2 C6.2 C12.2
  Bottom Layer w0.25: v1(17.293,49) 16.393,48.1 15.75,48.1 15.075,47.425 15.075,38.518 16.239,37.354 S1.2 14.5,32.816 14.5,31.093 16.239,29.354 S2.2 17.945,26.555 v1(18.5,26) v1(18.5,22.5) ; R3.2 18,10 ; S6.2 17.445,2.555 16.239,3.761 15.523,3.761 14.759,4.525 14.3,4.525 13.875,4.95 13.875,5.55 14.3,5.975 14.9,5.975 14.95,5.925 15.178,5.925 v1(16.008,6.755) 16.239,6.755 16.004,6.99 16.004,8.015 16.239,8.25 16.12,8.369 16.12,10.436 S4.2 ; X1.A1 21.65,5.575 22.081,6.006 22.856,6.006 23,6.15 28,6.15 28.247,6.15 28.594,5.804 28.594,5.556 29.35,4.8 X1.A12 ; DD2.11 24.25,10.305 C11.2 24.088,14.162 18.25,14.162 18,13.912 R21.1 18,10 ; v1(26.818,24.748) 26.934,24.632 27.368,24.632 v1(28.5,23.5) 28.417,23.417 27.917,23.417 v1(26.25,21.75) ; X1.1@28,1.85 30.125,1.85 30.2,1.775 30.8,1.775 31.225,2.2 31.225,2.725 31.9,3.4 33.75,3.4 ; v1(30.367,16.699) 30.492,16.824 30.824,16.824 31.225,17.225 31.225,20.8 30.8,21.225 28.55,21.225 28.3,21.475 27.7,21.475 27.466,21.241 27.259,21.241 26.833,21.667 26.333,21.667 v1(26.25,21.75) ; v1(32.25,6.75) 32.25,5.448 33.75,3.948 ; v1(39,36.5) 39.176,36.5 39.498,36.822 39.822,36.822 40.45,37.45 44.2,37.45 v1(45.5,38.75) ; S4.2 17.445,10.555 18,10 ; S4.2 14,12.794 14,16.316 S3.2 18.5,20.816 v1(18.5,22.5) ; v1(18.5,22.5) 25.5,22.5 v1(26.25,21.75)
  Bottom Layer w0.5: 31.5,2.75 v1(32.5,1.75) ; v1(31.978,38.522) 34.4,36.1 36.546,36.1 36.746,36.3 37.55,36.3 37.75,36.5 v1(39,36.5) ; 33.75,3.4 33.75,3.948 34.252,4.45 34.8,4.45 36.2,5.85 36.2,6.2 R9.2 36.5,6.65 37.05,7.2 37.05,7.366 37.284,7.6 37.35,7.6 38.75,9 38.75,10 39.15,10.4 39.85,10.4 D1.2 41.15,10.5 41.8,9.85 42.05,9.85 42.15,9.75 VD5.1 v1@44.099,9.5 ; v1(41.369,23.783) 45.819,23.783 X3.6 48.5,20.824 48.107,20.431 48.107,20.357 47.25,19.5 47.25,17 46.5,16.25 44.15,16.25 43.5,15.6 43.25,15.6 43.15,15.5 VD14.1 43.15,15 43.25,14.9 43.5,14.9 45.5,12.9 45.5,12.75 47.75,10.5 47.75,9.646 ; v1(42.5,27.5) 42.5,25.643 42.55,25.593 42.55,24.85 VD4.1@42.65,24.75 ; v1(44.25,9.5) 45.25,8.5 47.457,8.5 47.75,8.793 47.75,9.646 ; v1(48.82,9.893) 47.996,9.893 47.75,9.646
  other v1: 1.25,1 2.887,1 5,1 7,1 9.25,1 11,1 14.25,1 16.25,1 26.25,1 30.5,1 41,1 42.75,1 44.75,1 46.75,1 48.75,1 15.25,3 41,3 31.75,3.25 36.5,3.25 48.75,3.25 41,4.5 48.75,5.25 10.275,6.5 14.5,6.75 48.75,7.25 16,8.25 14.521,8.268 17.495,8.296 5.556,9.226 3.5,9.25 11.25,10.5 14,10.5 11.25,12.25 34.888,12.862 13.25,13.25 45.75,13.25 47.5,13.25 49,13.25 14.25,14.25 19.023,14.409 20.5,14.5 22,14.5 11.5,16 2.75,16.75 5,16.75 44.75,16.75 46,16.75 47,18 32.096,18.203 23.5,18.75 11.25,19 38.25,20 13.75,20.75 30.5,20.75 38.243,21.424 28.5,22.25 47,23 13.75,23.25 29.75,23.5 44.25,23.5 9,24.75 44.25,24.75 2.75,25 5.25,25 13.75,25 44.25,26 32,26.524 23,27 24.5,27 13.75,27.25 44,27.5 45.25,27.5 21,28.75 22.75,28.75 45.25,29 13.75,29.25 20,30.25 21.75,30.25 37,31 10,32.75 13.75,32.75 3,33 5.5,33 14,35.5 44.75,35.75 44.75,37.25 14,37.75 28.5,38.5 30.25,38.5 12,39.25 22.1,39.973 2.75,40 5.25,40 20.25,40 23.75,40 40.25,40.75 42.25,40.75 16.25,42.75 40.25,43.5 49,43.5 16.25,44.275 49,46.25 16.25,46.75 42.5,48.75 45.5,48.75 49,48.75 3.25,49 5.25,49 7.5,49 9.75,49 12.5,49 15,49
L0: DD1.15 R22.2 | length 10
  Top Layer w0.25: DD1.15 33.675,37.675 34.6,38.6 34.945,38.6 37,40.655 R22.2
L1: DD1.1 R23.2 | length 3.6
  Top Layer w0.25: DD1.1 35,41.005 R23.2
L2: DD1.2 R24.2 | length 3.8
  Top Layer w0.25: R24.2 33,43.25 33.675,42.575 DD1.2
L3: DD1.3 R25.2 | length 4.1
  Top Layer w0.25: R25.2 31,43.5 32.319,42.181 32.319,41.036 DD1.3
L4: DD1.4 R26.2 | length 4.5
  Top Layer w0.25: R26.2 29.15,44.5 29.575,44.075 29.575,43.925 31.13,42.37 31.13,40.955 DD1.4
L5: DD1.5 R27.2 | length 4.9
  Top Layer w0.25: R27.2 27.15,44.5 27.575,44.075 27.575,43.925 29.564,41.936 29.657,41.936 29.865,41.728 DD1.5
L6: DD1.6 R28.2 | length 5.7
  Top Layer w0.25: R28.2@25.139,44.361 25.279,44.221 25.279,43.721 25.5,43.5 27,43.5 28.595,41.905 DD1.6
L7: DD1.7 R29.2 | length 6.5
  Top Layer w0.25: R29.2 23.279,44.221 23.279,43.721 24.525,42.475 26.478,42.475 27.017,41.936 27.117,41.936 27.325,41.728 DD1.7
MOSI: DD1.14 U1.28 | length 22
  Top Layer w0.25: DD1.14 32.405,35.272 32.008,34.875 31.95,34.875 31.525,34.45 31.525,33.85 32.134,33.241 v1(34.095,33.241) ; U1.28 34.249,21.25 v1@36.999,24
  Bottom Layer w0.25: v1(34.095,33.241) 34.095,33.065 34.5,32.66 34.5,31.775 37.725,28.55 37.725,24.725 v1(37,24)
nCS: DD1.12 R14.2 U1.25 | length 24.8
  Top Layer w0.25: DD1.12 29.865,34.726 30.125,34.466 30.125,34.35 31.975,32.5 31.975,31.136 33.472,29.639 33.472,29.028 v1(33.5,29) ; U1.25 33.975,19.75 34.45,20.225 36.475,20.225 R14.2 ; v1(36.112,19.35) 36.234,19.471 36.471,19.471 R14.2@36.471,20.221
  Bottom Layer w0.25: v1(33.5,29) 33.624,28.876 33.624,28.401 33.775,28.25 33.775,27.705 34.1,27.38 34.1,25.702 33.775,25.377 33.775,23.175 35.725,21.225 35.725,20.255 35.988,19.992 35.988,19.474 v1(36.112,19.35)
NetC8_1: C8.1 D1.1 | length 2.3
  Bottom Layer w0.5: D1.1 42.2,11.45 C8.1
NetC8_2: C8.2 D1.6 L1.1 VD5.2 | length 14.4
  Bottom Layer w0.25: 37.75,12.75 38.016,12.75 38.266,13 43.354,13 43.75,12.604 C8.2
  Bottom Layer w0.5: D1.6 37.55,12.55 37.75,12.75 L1.1@37.75,15.25 ; C8.2 43.75,11.35 44.05,11.05 44.2,11.05 45.4,9.85 45.75,9.85 45.85,9.75 VD5.2
NetC11_1: C11.1 DD2.1 R16.1 | length 3.3
  Bottom Layer w0.25: C11.1 R16.1 27.395,13.855 DD2.1
NetD1_3: D1.3 R8.2 R9.1 | length 4.9
  Bottom Layer w0.5: R9.1 R8.2 39.5,9.1 39.55,9.15 39.55,9.45 39.65,9.55 D1.3
NetD1_4: D1.4 R4.2 | length 5.6
  Bottom Layer w0.5: R4.2 34.03,9.47 34.03,8.72 34.5,8.25 36.25,8.25 37.15,9.15 37.15,9.45 37.25,9.55 D1.4
NetDD1_10: DD1.10 R19.2 | length 6.4
  Top Layer w0.25: R19.2 23.75,36.9 24.175,37.325 24.325,37.325 25.5,38.5 26.5,38.5 27.325,37.675 DD1.10
NetDD2_2: DD2.2 R31.1 | length 2.9
  Bottom Layer w0.25: DD2.2 28.5,11.25 29.221,11.971 29.971,11.971 R31.1
NetDD2_3: DD2.3 R32.2 | length 2.6
  Bottom Layer w0.25: DD2.3 R32.2
NetDD2_4: DD2.4 DD2.5 | length 4.8
  Bottom Layer w0.25: DD2.5 27.52,8.375 29.354,8.375 29.5,8.521 29.5,8.75 29,9.25 DD2.4
NetDD2_9: DD2.9 R21.2 | length 2.6
  Bottom Layer w0.25: R21.2 19.5,12.35 19.925,11.925 20.075,11.925 20.325,11.675 20.623,11.675 20.77,11.529 20.77,11.425 20.945,11.25 DD2.9
NetR1_1: R1.1 S5.1 S5.4 | length 10.4
  Top Layer w0.25: R1.1 10.5,47 S5.1 13.75,47 14.725,46.025 16.55,46.025 17.525,47 S5.4
NetR10_2: R10.2 R18.1 VT4.1 | length 4.2
  Top Layer w0.25: R10.2 34.955,10.545 VT4.1
NetR11_2: R11.2 R34.2 VT4.3 | length 9.2
  Top Layer w0.25: VT4.3 34.005,3.968 34.18,3.793 34.533,3.793 34.575,3.75 35.5,3.75 36.25,4.5 R11.2 R34.2
NetR12_2: R12.2 VD3.1 | length 1.5
  Top Layer w0.5: R12.2 VD3.1
NetR15_2: R15.2 VD2.1 | length 1.5
  Top Layer w0.5: R15.2 VD2.1
NetR17_1: R17.1 R20.1 VT2.1 | length 4.7
  Top Layer w0.5: R20.1 R17.1 41.7,30.5 42.175,30.975 42.175,31.4 42.225,31.45 VT2.1
NetR22_1: R22.1 VD6.1 | length 1.5
  Top Layer w0.5: R22.1 VD6.1
NetR23_1: R23.1 VD7.1 | length 1.5
  Top Layer w0.5: R23.1 VD7.1
NetR24_1: R24.1 VD8.1 | length 1.5
  Top Layer w0.5: R24.1 VD8.1
NetR25_1: R25.1 VD9.1 | length 1.5
  Top Layer w0.5: R25.1 VD9.1
NetR26_1: R26.1 VD10.1 | length 1.5
  Top Layer w0.5: R26.1 VD10.1
NetR27_1: R27.1 VD11.1 | length 1.5
  Top Layer w0.5: R27.1 VD11.1
NetR28_1: R28.1 VD12.1 | length 1.5
  Top Layer w0.5: R28.1 VD12.1
NetR29_1: R29.1 VD13.1 | length 1.5
  Top Layer w0.5: R29.1 VD13.1
NetR30_2: R30.2 R33.2 VT2.3 | length 7.6
  Top Layer w0.5: R33.2 R30.2 41.609,32 41.759,32.15 44.1,32.15 44.993,31.257 44.993,30.507 VT2.3
NetR33_1: R33.1 VT3.1 | length 8.7
  Top Layer w0.5: v1(37.491,33.011) 37.511,33.011 37.7,33.2 38.275,33.2 R33.1 ; VT3.1 42.7,35.5 42.7,36.2 v1(42.75,36.25)
  Bottom Layer w0.5: v1(37.491,33.011) 39.511,33.011 v1(42.75,36.25)
NetR34_1: R34.1 VT1.1 | length 9.9
  Top Layer w0.25: R34.1 37.75,12.854 37.896,13 38.929,13 39.089,12.839 39.089,12.778 39.292,12.575 39.292,9.671 39.2,9.579 VT1.1
nRST: R7.1 U1.7 X2.5 | length 24.8
  Top Layer w0.25: R7.1@22.25,34.35 22.675,33.925 22.694,33.925 22.84,33.779 X2.5 20,32 18,30 18,26.525 17.775,26.3 17.775,21.225 18.5,20.5 21.066,20.5 22.816,22.25 U1.7
OSC_IN: BQ1.3 U1.5 | length 4.7
  Top Layer w0.25: BQ1.3 20.084,24 21.5,24 22.25,23.25 U1.5
OSC_OUT: BQ1.1 U1.6 | length 4.9
  Top Layer w0.25: BQ1.1 21.516,21.516 22.75,22.75 U1.6
POWER_ON: R10.1 U1.42 | length 40.2
  Top Layer w0.25: U1.42 28.741,26.609 28.741,27.734 28.275,28.2 28.275,29.604 28.921,30.25 v1(29,30.25) ; v1(32.25,34.15) 32.35,34.25 33.25,34.25 33.534,33.966 34.395,33.966 34.82,33.541 34.82,32.037 34.5,31.717 34.5,30.75 34.75,30.5 34.75,29.82 35.212,29.358 35.212,28.212 34.775,27.775 33.836,27.775 v1(32.975,26.914) ; R10.1 33.429,10.929 33.429,12.429 34.75,13.75 v1(35.5,13.75) ; v1(34.75,19.5) 34.75,18.25 v1(35.5,17.5)
  Bottom Layer w0.25: v1(29,30.25) 29,30.286 29.435,30.721 29.435,32.425 31.255,34.245 32.155,34.245 v1(32.25,34.15) ; v1@32.851,26.614 32.851,26.35 32.5,25.999 32.5,21.75 v1(34.75,19.5) ; v1(35.5,13.75) v1(35.5,17.5)
SCK: DD1.11 U1.26 | length 21
  Top Layer w0.25: DD1.11 28.595,35.272 28.897,34.97 28.94,34.97 29.185,34.725 29.3,34.725 29.725,34.3 29.725,34.185 31.575,32.335 31.575,30.97 32.75,29.795 32.75,28.725 32.904,28.571 32.904,28.096 v1(33,28) ; U1.26 33.909,20.25 34.485,20.826 34.85,20.826 v1(34.974,20.95)
  Bottom Layer w0.25: v1(33,28) 33,27.914 33.7,27.214 33.7,25.868 33.375,25.543 33.375,22.125 34.013,21.487 34.345,21.487 34.882,20.95 v1(34.974,20.95)
SOLENOID: R20.2 U1.30 | length 10.7
  Top Layer w0.25: U1.30 34.25,22.25 36.275,24.275 36.275,24.3 36.7,24.725 36.725,24.725 37,25 v1(37,25.9)
  Top Layer w0.5: v1(37,28.25) 37.507,28.757 38.332,28.757 R20.2
  Bottom Layer w0.5: v1(37,25.9) v1(37,28.25)
SW1: U1.41 X3.3 | length 41.8
  Top Layer w0.25: v1(29,28.5) 29,28.324 29.25,28.074 U1.41 ; v1(36.288,32.127) 36.377,32.127 36.75,32.5 36.75,33.295 37.191,33.736 37.247,33.736 37.6,34.088 37.6,34.164 37.761,34.325 39.575,34.325 40,34.75 40.041,34.75 44.791,39.5 47.389,39.5 47.975,38.914 47.975,33.086 47.48,32.591 47.48,28.57 48.273,27.777 48.273,27.244 X3.3
  Bottom Layer w0.25: v1(29,28.5) 29.525,28.5 29.677,28.651 29.883,28.651 30.307,29.076 30.307,29.282 31.885,30.86 31.885,32.774 32.136,33.025 32.716,33.025 33.657,33.966 34.395,33.966 34.954,33.408 34.954,33.111 35.613,32.452 35.817,32.452 36.142,32.127 v1(36.288,32.127)
SW2: U1.40 X3.2 | length 40.2
  Top Layer w0.25: U1.40 v1@29.75,29.074 ; v1(39,35.45) 39.033,35.483 39.433,35.483 44.25,40.3 47.72,40.3 49.625,38.395 49.625,30.107 X3.2
  Bottom Layer w0.25: v1(29.582,29.376) 29.582,29.418 29.5,29.5 31.485,31.485 31.485,32.94 31.97,33.425 32.55,33.425 33.525,34.4 34.527,34.4 35.354,33.573 35.354,33.277 35.778,32.852 36.307,32.852 37.191,33.736 37.286,33.736 v1(39,35.45)
SW3: U1.39 X3.1 | length 38.9
  Top Layer w0.25: v1(29,34) 29,32.935 29.435,32.5 29.435,30.84 29.725,30.55 29.725,30.3 30.25,29.775 30.25,29.734 30.307,29.677 30.307,29.076 30.25,29.019 U1.39 ; v1(36.875,34.388) 37.051,34.388 37.387,34.725 39.3,34.725 39.725,35.15 39.875,35.15 44.625,39.9 47.555,39.9 48.517,38.937 X3.1
  Bottom Layer w0.25: v1(29,34) 30.2,35.2 35.3,35.2 36.031,34.469 36.795,34.469 v1(36.875,34.388)
SW4: U1.17 X3.7 | length 24.7
  Top Layer w0.25: U1.17 27.76,18.39 27.76,16.85 v1(27.854,16.755) ; v1(44.75,18) 45.025,18.275 45.55,18.275 46.331,19.056 48.456,19.056 X3.7
  Bottom Layer w0.25: v1(27.854,16.755) 27.97,16.755 28.175,16.55 28.784,16.55 29.001,16.333 29.142,16.333 29.901,15.574 30.833,15.574 31.492,16.233 31.492,16.271 32.071,16.85 32.325,16.85 32.7,17.225 33.066,17.225 33.539,17.698 34.077,17.698 34.154,17.775 34.3,17.775 34.75,18.225 36.586,18.225 36.636,18.275 36.673,18.275 36.899,18.501 44.084,18.501 44.585,18 v1(44.75,18)
SWCLK: U1.37 X2.2 | length 5.7
  Top Layer w0.25: X2.2 31.175,31.285 31.175,29.734 31.25,29.659 U1.37
SWDIO: U1.34 X2.1 | length 10.6
  Top Layer w0.25: U1.34 34.25,24.25 v1(34.5,24) ; X2.1 33.988,31.012 33.988,30.697 34.35,30.334 34.35,29.654 34.487,29.517 v1(34.487,28.513)
  Bottom Layer w0.25: v1(34.487,28.513) 34.5,28.5 v1(34.5,24)
TACHO: U1.29 X3.8 | length 26.2
  Top Layer w0.15: v1(46.448,19.781) 46.566,19.781 46.872,20.087 48.909,20.087 49.487,19.509 49.487,18.085 X3.8
  Top Layer w0.25: v1@31.25,21.75 U1.29
  Bottom Layer w0.25: v1(30.994,21.998) 30.994,21.862 31.625,21.231 31.625,19.371 31.771,19.225 34,19.225 34.6,18.625 36.42,18.625 36.47,18.675 36.507,18.675 36.757,18.925 39.4,18.925 40.426,19.951 41.024,19.951 41.2,19.775 46.442,19.775 v1(46.448,19.781)
USB_D+: U1.33 X1.A6 X1.B6 | length 25.3
  Top Layer w0.25: X1.A6 24.95,15.529 24.997,15.576 25.35,15.576 v1(25.474,15.7) ; v1(28,20.75) 28.176,20.75 28.387,20.961 28.456,20.961 28.669,21.174 28.713,21.174 29.137,21.599 29.137,21.778 31.109,23.75 U1.33
  Bottom Layer w0.15: X1.A6 26.05,3.575 X1.B6 ; v1(25.474,15.7) 25.618,15.844 25.618,16.604 28,18.987 v1(28,20.75)
USB_D-: U1.32 X1.A7 X1.B7 | length 24.2
  Top Layer w0.25: X1.B7 25.945,4.32 X1.A7@25.945,4.57 ; X1.A7 25.964,4.761 25.964,5.286 25.5,5.75 25.5,14.525 26.199,15.225 26.199,15.623 26.276,15.7 26.276,16.071 v1(26.4,16.195) ; v1(29.02,20.5) 29.144,20.624 29.144,21.04 29.537,21.433 29.537,21.612 31.175,23.25 U1.32
  Bottom Layer w0.25: v1(26.4,16.195) 26.524,16.32 26.524,17.016 29,19.492 29,20.48 v1(29.02,20.5)
VBUS: C3.1 D1.5 R4.1 R6.1 R11.1 R16.2 R30.1 VT1.2 VT3.2 X1.A4 X1.A9 X1.B4 X1.B9 | length 82.1
  Top Layer w0.25: X1.B9 X1.A4 X1.A4@22.75,4.949 ; X1.B4 X1.A9
  Top Layer w0.5: v1(30.5,2.5) 30.5,7.048 30.549,7.097 30.549,7.801 30.25,8.1 v1(30.25,13.75) 30.327,13.827 31.268,13.827 31.842,14.4 31.966,14.4 32.317,14.751 33.16,14.751 33.384,14.975 36.4,14.975 36.65,14.975 ; v1(36.436,12.501) 36.4,12.537 36.4,14.725 36.65,14.975 ; R6.1 38.25,2.907 37.957,3.2 37.784,3.2 37.3,3.684 VT1.2 37.3,8.4 37.75,8.85 R11.1 37.75,9.15 38.25,9.65 38.466,9.65 38.7,9.884 38.7,11.616 38.643,11.673 38.643,12.198 v1(38.567,12.275) ; R30.1 42.175,33.5 42.225,33.55 VT3.2 42.668,33.532 43.718,33.532 46.1,31.15 46.1,30.991 46.125,30.966 46.125,23.577 43.65,21.102 43.65,20.705 41.321,18.376 40.051,18.376 36.65,14.975
  Bottom Layer w0.15: X1.B9 23.5,2.6 27.384,2.6 27.85,3.066 27.89,3.066 28.174,3.35 X1.B4
  Bottom Layer w0.25: X1.B4 29.1,2.5 v1(30.5,2.5)
  Bottom Layer w0.5: R16.2 v1@29.892,14 ; R4.1 R4.1@35.25,9.9 ; v1(36.436,12.501) 36.436,12.314 36.5,12.25 36.155,11.905 35.55,11.905 35.25,11.605 C3.1 R4.1@35.25,9.9 ; v1(38.567,12.275) 38.643,12.198 38.643,11.916 38.665,11.893 38.665,10.835 38.431,10.6 37.65,10.6 D1.5 36,10.5 35.7,10.2 35.55,10.2 R4.1@35.25,9.9
VCC_MECH: R12.1 VD14.2 VT1.3 X3.9 | length 20.5
  Top Layer w0.5: VT1.3 38.25,4.75 38.3,4.8 38.725,4.8 39.475,5.55 39.752,5.55 42.702,8.5 44.707,8.5 45.1,8.893 45.1,9.852 44.609,10.343 44.609,11.391 R12.1 44.5,13.944 45.653,15.097 X3.9
  Bottom Layer w0.5: VD14.2 48.347,15.25 X3.9
VCC_SOLENOID: R15.1 VD4.2 VT3.3 X3.4 | length 13.6
  Top Layer w0.5: VT3.3 45.425,34.5 45.625,34.3 46.45,34.3 R15.1 ; R15.1@46.75,33.75 46.75,31.269 46.9,31.119 46.9,26.616 X3.4
  Bottom Layer w0.5: VD4.2 48.516,25 X3.4
pads on no net: DD1.9 DD2.8 DD2.10 S1.3 S1.4 S2.3 S2.4 S3.3 S3.4 S4.3 S4.4 S6.3 S6.4 U1.2 U1.3 U1.4 U1.11 U1.15 U1.21 U1.22 U1.27 U1.31 U1.38 U1.43 U1.45 U1.46 X1.A8 X1.B8

## Polygon pours and split planes (outlines as drawn)
GND on Bottom Layer "GND_L02_P002" (solid, remove dead copper, pour order 2): 0,0 0,50 50,50 50,0
GND on Top Layer "GND_L01_P003" (solid, remove dead copper, pour order 3): 0,50 50,50 50,0 0,0

## Keep-outs
Keep-Out Layer:
  the board outline again, w0.1

## Other copper
Top Layer:
  pour cut-out: 41.9,2 41.9,8 47.9,8 47.9,2
  pour cut-out: 1.9,42.1 1.9,48.1 7.9,48.1 7.9,42.1
  pour cut-out: 42.1,42 42.1,48 48.1,48 48.1,42
  pour cut-out: 1.9,2 1.9,8 7.9,8 7.9,2
Bottom Layer:
  pour cut-out: 41.9,2 41.9,8 47.9,8 47.9,2
  pour cut-out: 1.9,42.1 1.9,48.1 7.9,48.1 7.9,42.1
  pour cut-out: 1.9,2 1.9,8 7.9,8 7.9,2
  pour cut-out: 42.1,42 42.1,48 48.1,48 48.1,42

## Silkscreen, mask and mechanical layers (free items; w line width, h text height)
Top Overlay:
  lines w0.254: 33,43.5 37,43.5 37.5,43 39,43
  text "SLND" at 41.25,37.807 h1
  text "+" at 45,36.5 h1.5
  text "REC" at 0.25,35 h3.2
  text "*" at 48,32.5 h3
  text "*" at 34.75,29.5 h5
  text "PLAY" at 0.25,27.5 h3.5
  text "STOP" at 0.25,19 h3.5
  text "+" at 47.25,12.25 h1.5
  text "REW" at 0.25,11 h3.5
  text "Cortex / TapeControl v1.2 / 260226" at 17.5,9.364 h1
  text "MECH" at 45.5,8.807 h1
Bottom Overlay:
  text "*" at 34.75,29.5 h5